# EAGLE board bottom_newtop (EAGLE 9.3.0)
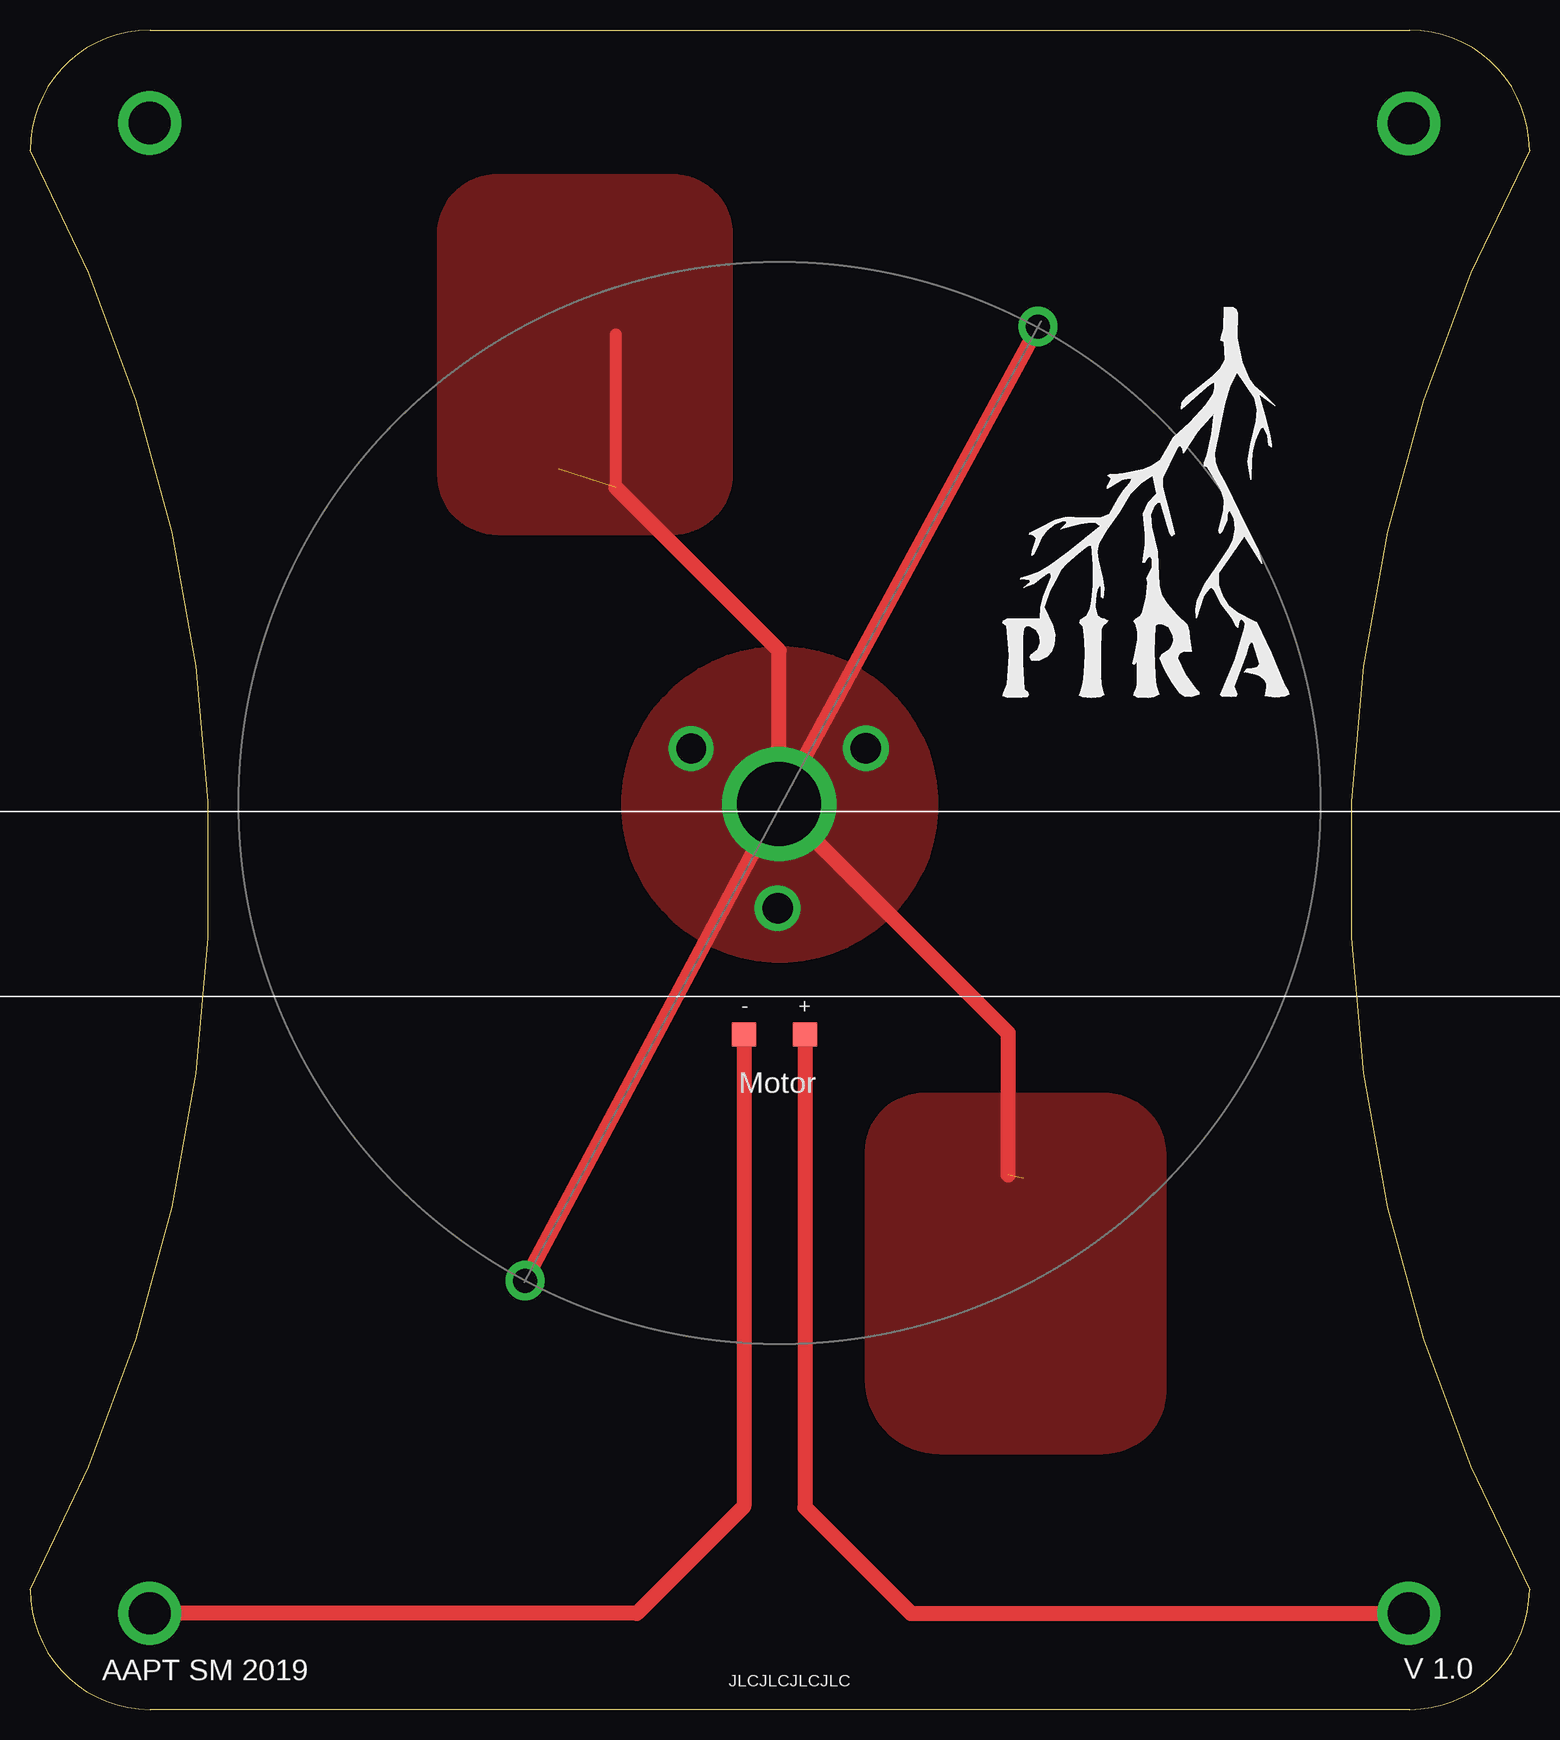
[diagram p0: board, top side]
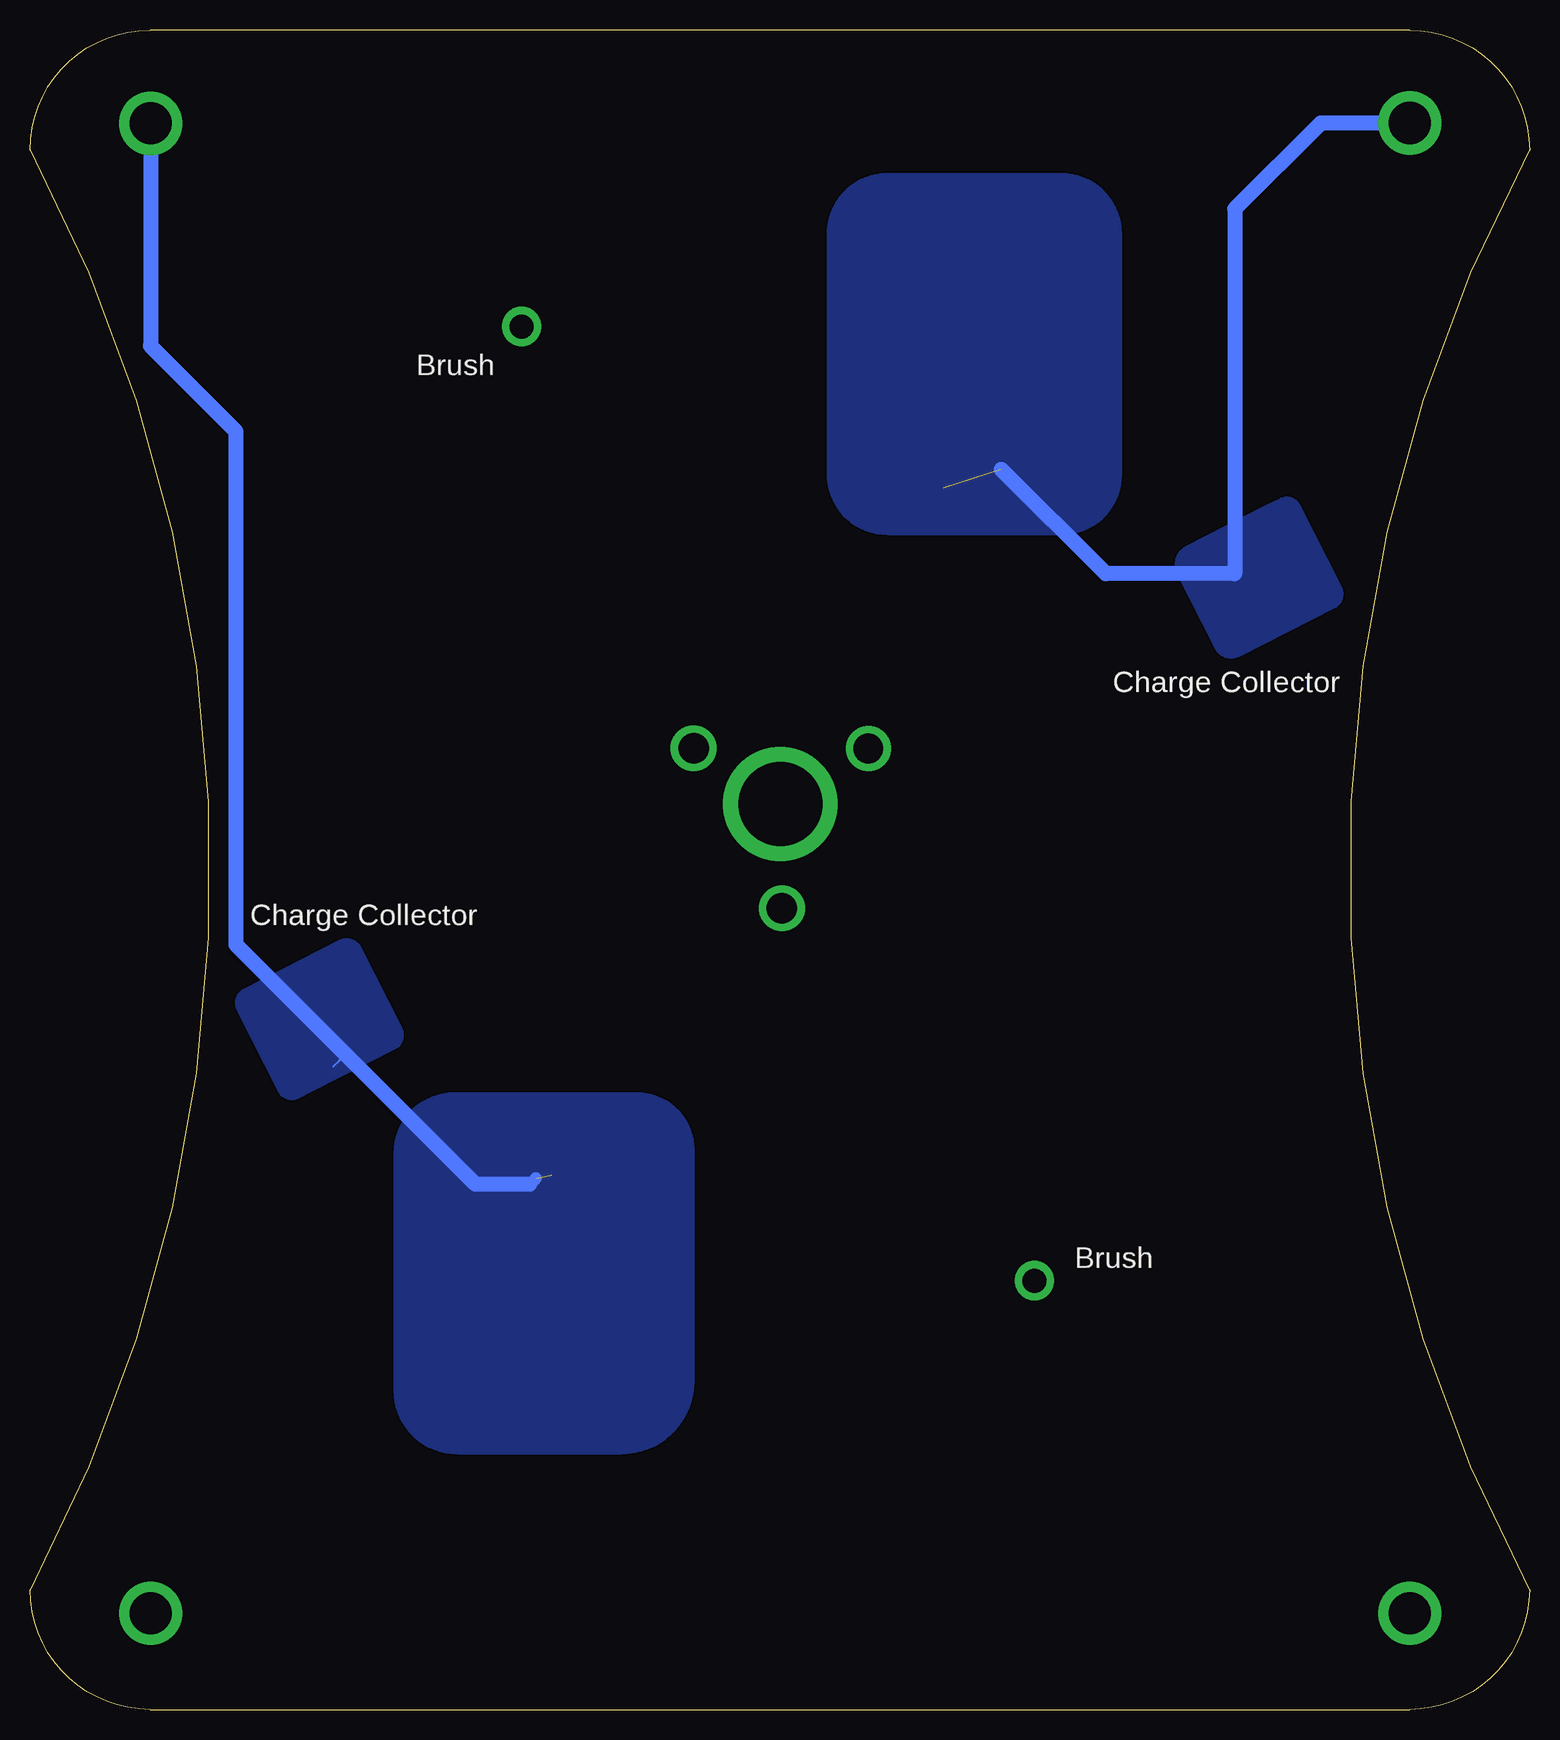
[diagram p1: board, bottom side, seen from below]

Size 125 x 140 mm. Coordinates in mm from the lower left corner, seen from the top.
Outline: 125,130 125,130
Outline: 125,130 arc0 125,130
Outline: 125,130 arc90 115,140 10,140 arc90 0,130 arc-56 0,10 arc90 10,0 115,0 arc90 125,10 arc-56 125,130
Copper layers (1*16): Top 0.035mm / dielectric 1.5mm / Bottom 0.035mm
Design rules "default *": minimum track width 6mil, minimum drill 0.35mm, track to track 6mil, track to pad 6mil, pad to pad 6mil, via to via 6mil, smd to smd 6mil, copper to edge 40mil, drill to drill 6mil, minimum pad ring 20mil, minimum via ring 25mil, stop-mask expansion 4mil, vias tented up to drill 0mil, thermal gap 10mil

## Footprints (pad centres in the part's own frame; a part is rotated, then mirrored left to right if it is on the bottom)
TP20SQ = smd 2 x 2: TP 0,0

## Placement (x,y rotation side)
+  TPTP20SQ  [TP20SQ]  59.51,56.27 0 top
-  TPTP20SQ  [TP20SQ]  64.59,56.27 0 top

## Library data of the parts
+ - = testpad

## Nets
N$3: +.TP
S$3: -.TP

## Tracks (layer width: path | path; a pad name or v marks a point on that pad's centre or on a via)
N$3  (via drill 3.51)
  Top 1.27: +.TP 59.51,16.92 50.6,8.01 v9.98,8.01
S$2  (via drill 2.01, 2.49, 2.54, 3.51, 6.99)  (2 unrouted)
  Top 0.508: 62.29,66.82 v62.32,66.79 | 61.89,75.48 v62.45,75.48
  Top 1.016: 48.85,101.86 48.85,114.63
  Top 1.27: 48.85,101.86 62.45,88.26 v62.45,75.48 | v41.28,35.74 v62.45,75.48 | v84.02,115.28 v62.45,75.48 | 81.52,44.54 81.52,56.41 v62.45,75.48
  Bottom 0.152: 99.2,55.11 99.2,54.12 99.72,53.6
  Bottom 1.016: 83.31,43.79 82.83,44.28
  Bottom 1.27: 83.31,43.79 87.89,43.79 99.2,55.11 107.85,63.76 107.85,106.54 114.96,113.65 114.95,113.7 v114.95,132.21 | v9.98,132.25 17.41,132.25 24.56,125.1 24.56,94.67 35.33,94.67 44.04,103.38
  other vias: 55.12,80.12 69.69,80.12
  pour Top: 63.13,88.4 arc-180 61.86,62.49 arc-180
  pour Top: 63.13,88.4 arc-180 61.86,62.49 arc-180
  pour Top: 34.02,102.98 34.02,122.98 arc-90 38.99,127.95 53.49,127.95 arc-90 58.49,122.95 58.49,102.95 arc-90 53.49,97.95 48.49,97.95 39.05,97.95 arc-90
  pour Bottom: 34.03,102.96 34.03,122.96 arc-90 39.05,127.99 53.52,127.99 arc-90 58.52,122.99 58.52,102.99 arc-90 53.52,97.99 48.52,97.99 39,97.99 arc-90
  pour Bottom: 69.66,27.4 69.66,46.61 arc-90 74.41,51.36 89.64,51.36 arc-90 94.64,46.36 94.64,26.61 arc-90 89.39,21.36 80.7,21.36 75.7,21.36 arc-90
  pour Bottom: 101.46,51.56 94.53,55.09 arc-90 93.97,56.8 97.39,63.51 arc-90 99.21,64.1 107.2,60.03 arc-90 107.76,58.32 104.3,51.54 arc-90 102.59,50.98
  pour Bottom: 21.96,100.33 28.66,96.92 arc-90 29.38,94.7 26.21,88.49 arc-90 24.15,87.82 16.22,91.86 arc-90 15.66,93.57 19.12,100.36 arc-90 20.83,100.91
  pour Top: 69.65,27.46 69.65,46.49 arc-90 74.58,51.41 89.51,51.41 arc-90 94.67,46.26 94.67,26.52 arc-90 89.44,21.29 75.82,21.29 arc-90
S$3  (via drill 3.51)
  Top 1.27: v114.95,8.01 73.43,8.01 64.59,16.84 -.TP

## Text on the board
tPlace: Motor | AAPT SM 2019 | V 1.0 | JLCJLCJLCJLC
bPlace: Brush | Charge Collector | Charge Collector | Brush